# EAGLE board scheme_old (EAGLE 6.5.0)
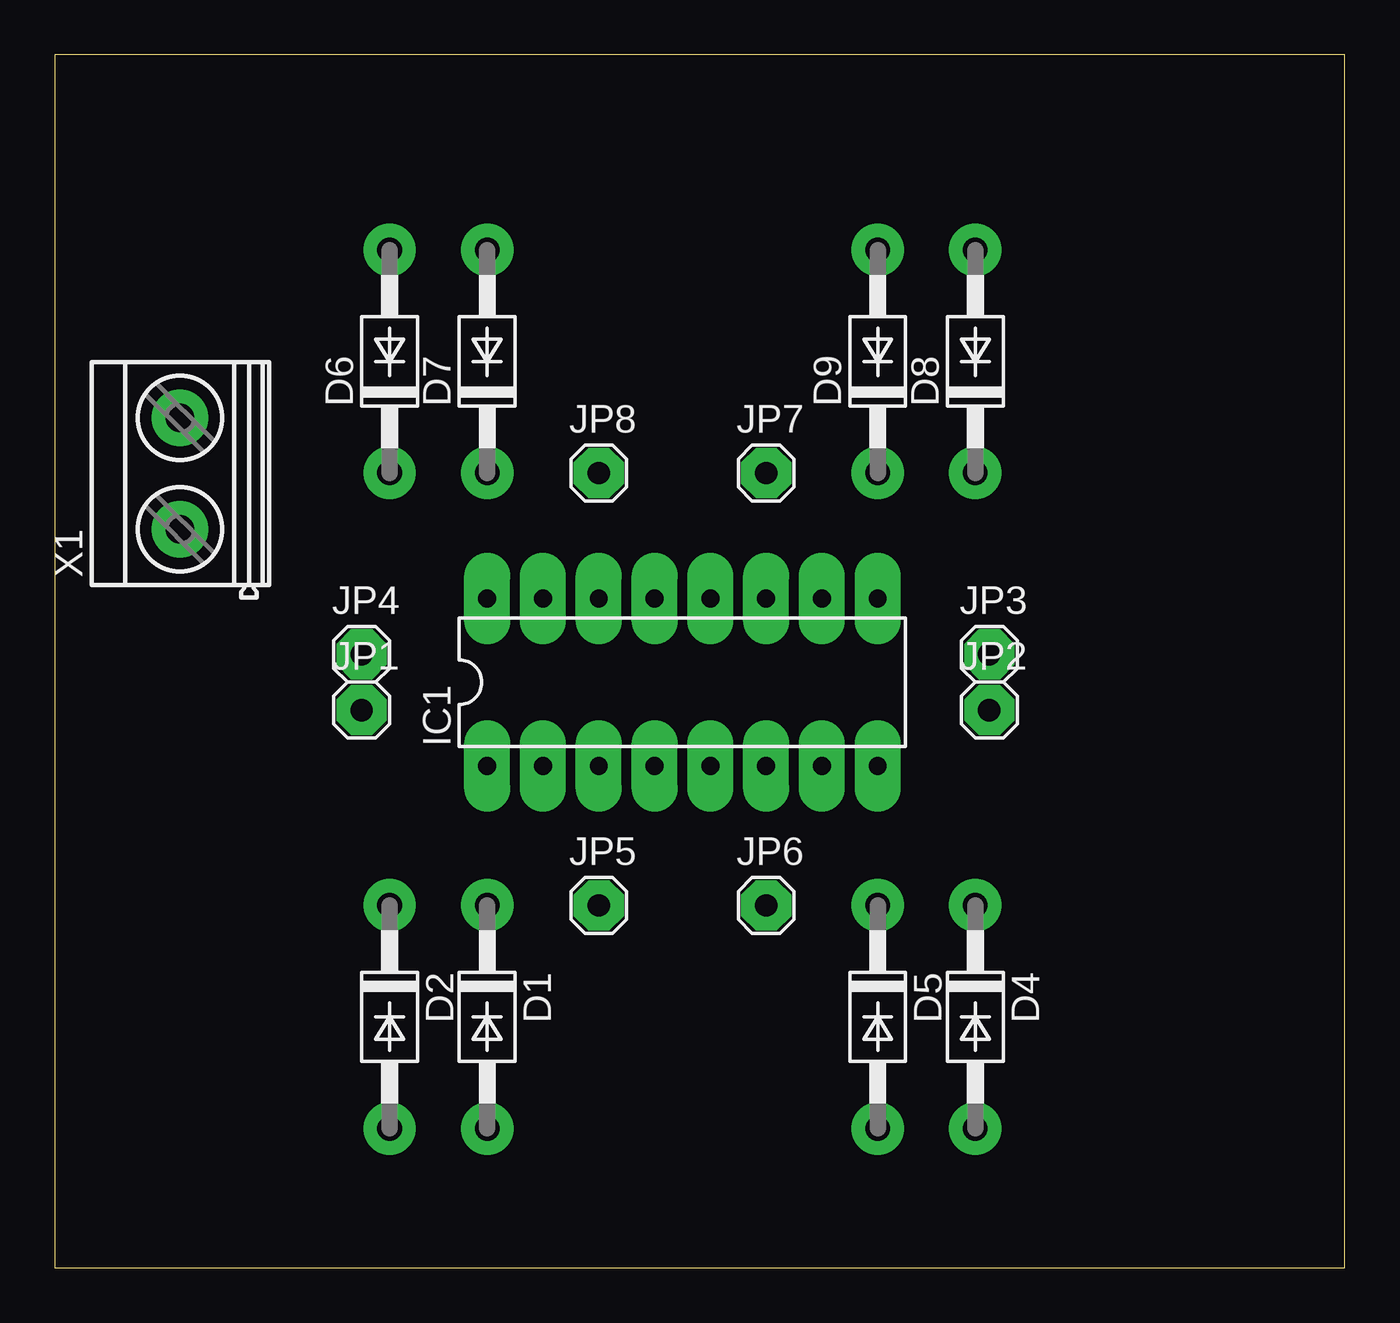
[diagram p0: board, top side]
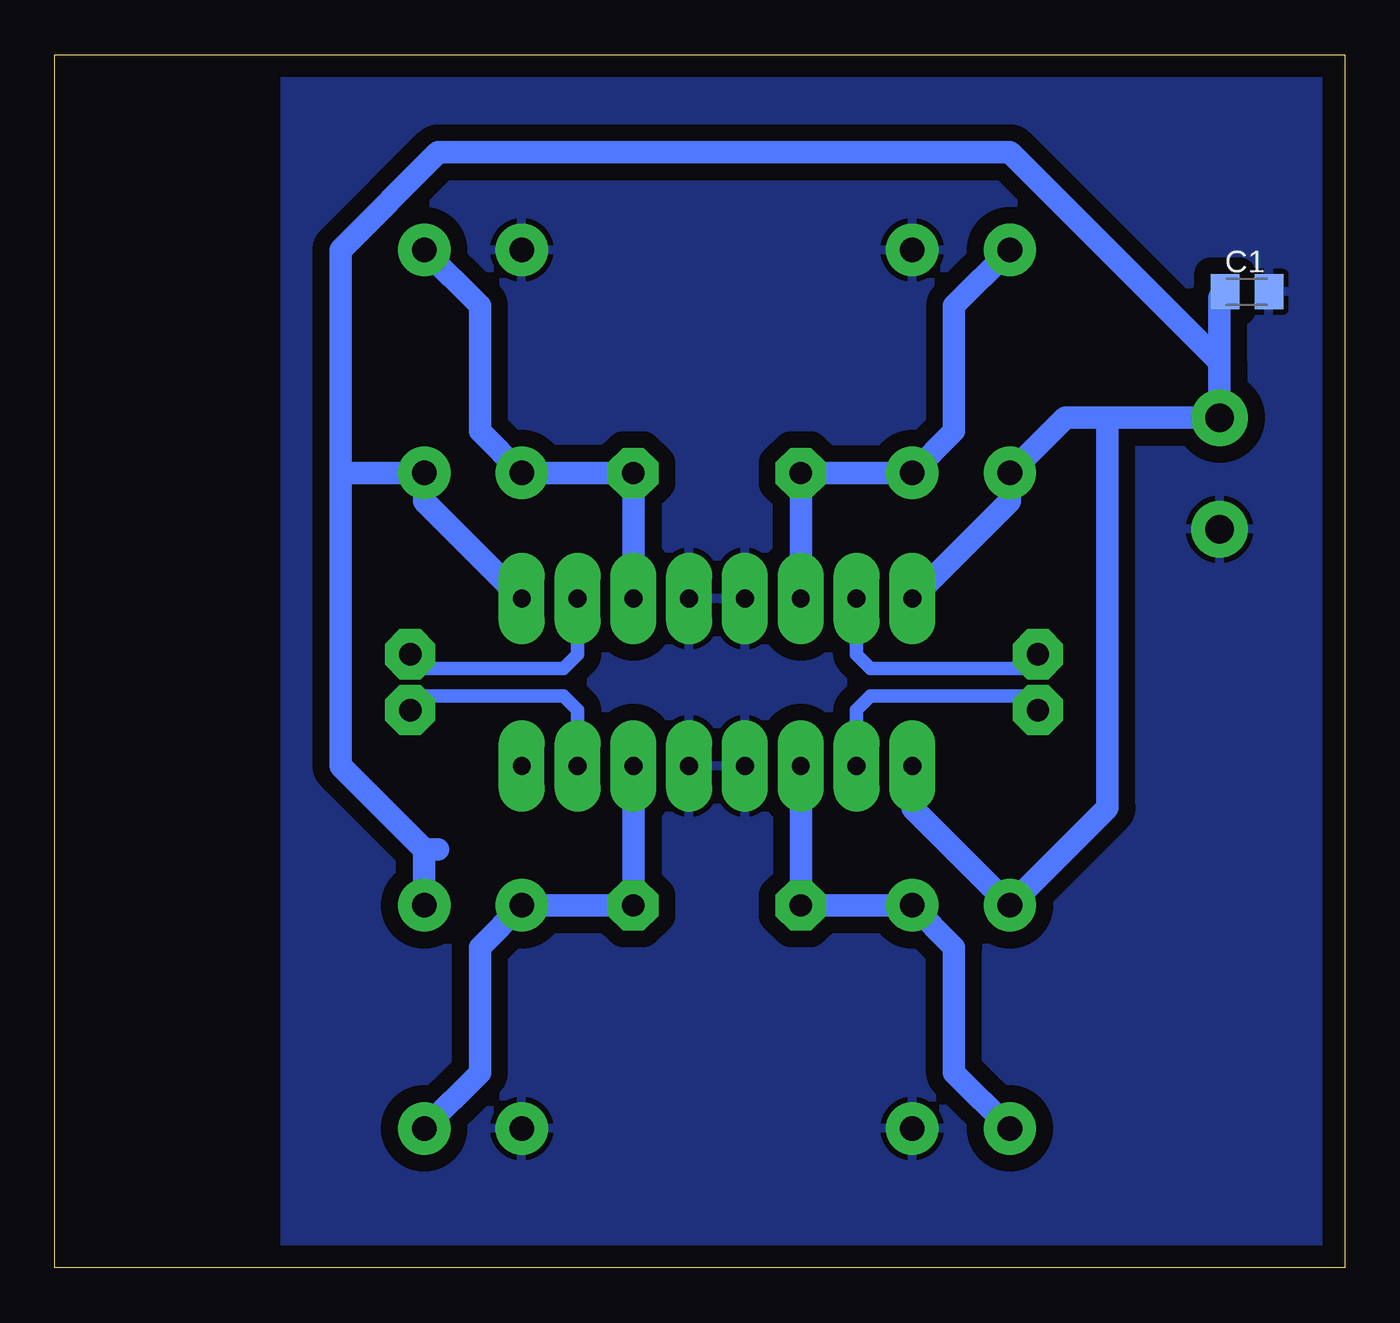
[diagram p1: board, bottom side, seen from below]

Size 58.73 x 55.23 mm. Coordinates in mm from the lower left corner, seen from the top.
Outline: 0,0 58.73,0 58.73,55.23 0,55.23 0,0
Copper layers (1*16): Top 0.035mm / dielectric 1.5mm / Bottom 0.035mm
Design rules "default": minimum track width 10mil, minimum drill 32mil, track to track 12mil, track to pad 12mil, pad to pad 12mil, via to via 12mil, smd to smd 8mil, copper to edge 40mil, drill to drill 40mil, minimum pad ring 25mil, minimum via ring 12mil, stop-mask expansion 4mil, vias tented up to drill 0mil, thermal gap 10mil

## Footprints (pad centres in the part's own frame; a part is rotated, then mirrored left to right if it is on the bottom)
C0805K = smd 1.3 x 1.6: 1 -1,0; 2 1,0
DO41-10 = drill 1.118: A 5.08,0; C -5.08,0
DIL16 = drill 0.813 long: 1 -8.89,-3.81; 2 -6.35,-3.81; 3 -3.81,-3.81; 4 -1.27,-3.81; 5 1.27,-3.81; 6 3.81,-3.81; 7 6.35,-3.81; 8 8.89,-3.81; 9 8.89,3.81; 10 6.35,3.81; 11 3.81,3.81; 12 1.27,3.81; 13 -1.27,3.81; 14 -3.81,3.81; 15 -6.35,3.81; 16 -8.89,3.81
1X01 = drill 1.016 octagon: 1 0,0
MKDSN1,5/2-5,08 = drill 1.3 pad 2: 1 -2.561,0.025; 2 2.519,0.025

## Placement (x,y rotation side)
C1  [C0805K]  4.45,44.45 0 bottom
D1  1N4933  [DO41-10]  19.68,11.43 270 top
D2  1N4933  [DO41-10]  15.24,11.43 270 top
D4  1N4933  [DO41-10]  41.91,11.43 270 top
D5  1N4933  [DO41-10]  37.47,11.43 270 top
D6  1N4933  [DO41-10]  15.24,41.27 90 top
D7  1N4933  [DO41-10]  19.68,41.27 90 top
D8  1N4933  [DO41-10]  41.91,41.27 90 top
D9  1N4933  [DO41-10]  37.47,41.27 90 top
IC1  L293E  [DIL16]  28.57,26.67 0 top
JP1  [1X01]  13.97,25.4 0 top
JP2  [1X01]  42.55,25.4 0 top
JP3  [1X01]  42.55,27.94 0 top
JP4  [1X01]  13.97,27.94 0 top
JP5  [1X01]  24.77,16.51 0 top
JP6  [1X01]  32.38,16.51 0 top
JP7  [1X01]  32.38,36.2 0 top
JP8  [1X01]  24.77,36.2 0 top
X1  MKDSN1,5/2-5,08  [MKDSN1,5/2-5,08]  5.71,36.2 90 top

## Library data of the parts
C1 = resistor
D1 D2 D4-D9 = diode
IC1 = texas; MF: Arrow Electronics; MPN: L293E; OC_FARNELL: 1467711; OC_NEWARK: 89K0732
JP1-JP8 = pinhead
X1 = con-phoenix-508; MPN: MKDSN 1,5/2-5.08; OC_FARNELL: 1792903; OC_NEWARK: 30M2397

## Nets
+5V: C1.1 D2.C D4.C D6.C D8.C IC1.1 IC1.9 IC1.16 X1.2
+12V: IC1.8
GND: C1.2 D1.A D5.A D7.A D9.A IC1.4 IC1.5 IC1.12 IC1.13 X1.1
IN1: IC1.2 JP1.1
IN2: IC1.7 JP2.1
IN3: IC1.10 JP3.1
IN4: IC1.15 JP4.1
OUT1: D1.C D2.A IC1.3 JP5.1
OUT2: D4.A D5.C IC1.6 JP6.1
OUT3: D8.A D9.C IC1.11 JP7.1
OUT4: D6.A D7.C IC1.14 JP8.1

## Tracks (layer width: path | path; a pad name or v marks a point on that pad's centre or on a via)
+5V
  Bottom 1.016: IC1.16 15.24,34.92 D6.C 12.72,38.71 10.79,38.71 | 10.79,38.71 X1.2 5.71,38.74 5.71,41.27 | 10.79,38.71 10.79,20.95 D2.C 19.68,20.95 IC1.1 | 5.71,41.27 15.24,50.8 41.27,50.8 45.72,46.35 45.72,36.2 | D4.C 41.91,19.05 | 41.91,19.05 45.72,22.86 45.72,36.2 | 41.91,19.05 41.27,19.05 | 45.72,36.2 D8.C 41.91,34.92 IC1.9 | 5.71,41.27 5.71,44.18 C1.1
GND
  pour Bottom (isolate 0.762): -3.17,56.52 48.26,56.52 48.26,-1.91 -3.17,-1.91
IN1
  Bottom 0.61: JP1.1 14.61,26.04 21.59,26.04 22.23,25.4 IC1.2
IN2
  Bottom 0.61: JP2.1 41.91,26.04 35.56,26.04 34.92,25.4 IC1.7
IN3
  Bottom 0.61: JP3.1 41.91,27.3 35.56,27.3 34.92,27.94 IC1.10
IN4
  Bottom 0.61: JP4.1 14.61,27.3 21.59,27.3 22.23,27.94 IC1.15
OUT1
  Bottom 1.016: D2.A 17.78,8.89 17.78,14.61 D1.C JP5.1 IC1.3
OUT2
  Bottom 1.016: D4.A 39.37,8.89 39.37,14.61 D5.C JP6.1 IC1.6
OUT3
  Bottom 1.016: IC1.11 JP7.1 D9.C 39.37,38.1 39.37,43.81 D8.A
OUT4
  Bottom 1.016: D6.A 17.78,43.81 17.78,38.1 D7.C JP8.1 IC1.14